# Altium PCB FLASHING_LED_23_9.PcbDoc
Units mm, origin at the board's own origin, x right, y up, seen from the top; angles counter-clockwise.
Board outline 43.05 x 19.56 mm, 2 copper layers (Top Layer, Bottom Layer); 9 components, 7 nets, 30 pads, 0 vias.
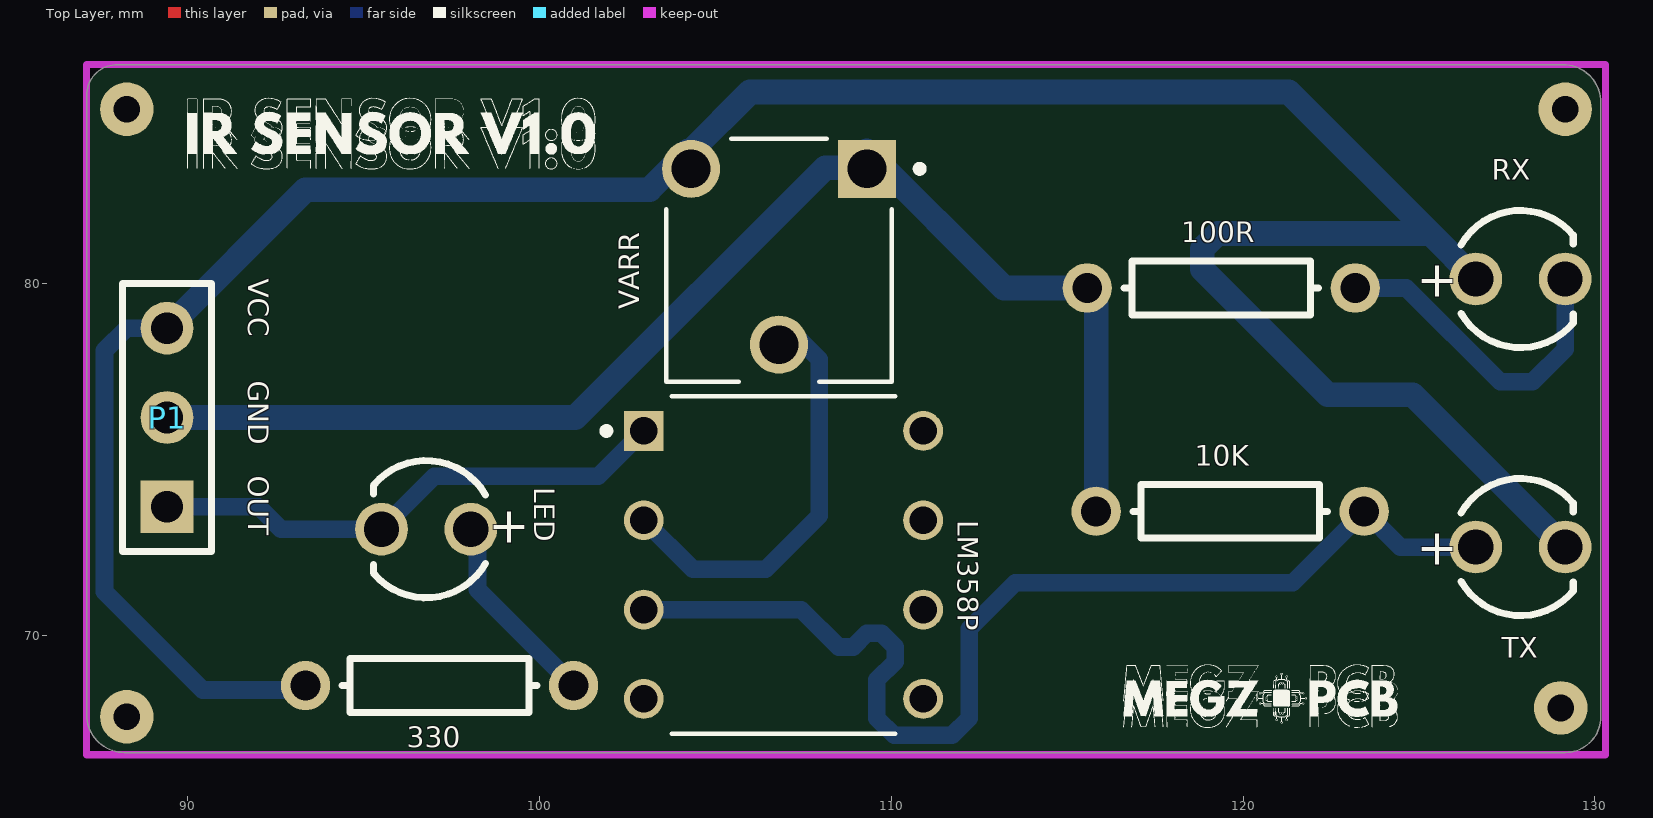
[diagram p0: Top Layer view]
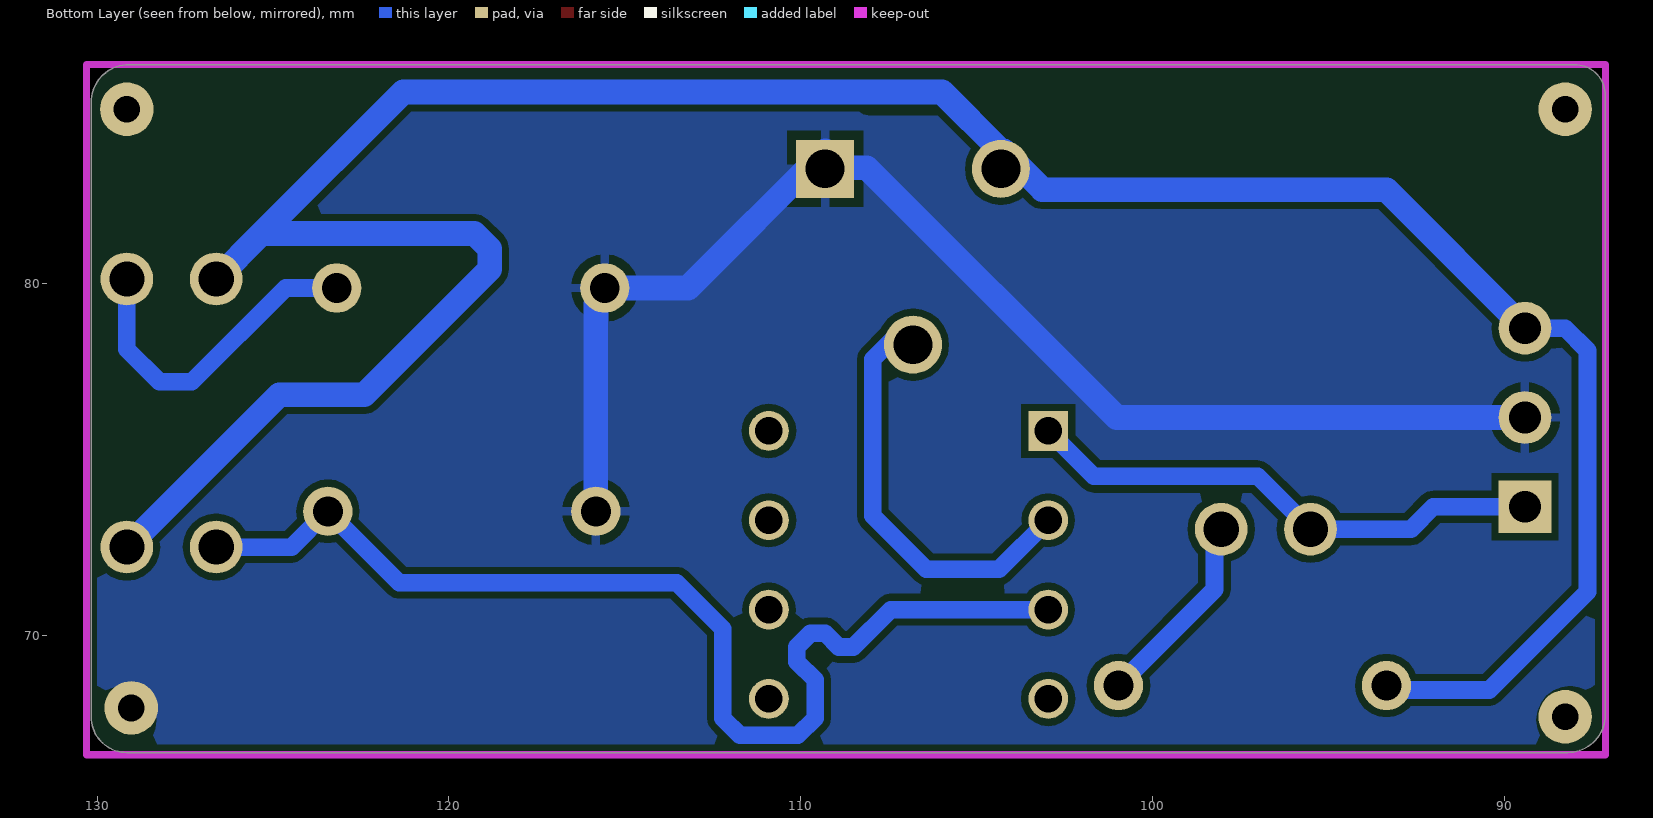
[diagram p1: Bottom Layer view, seen from below]
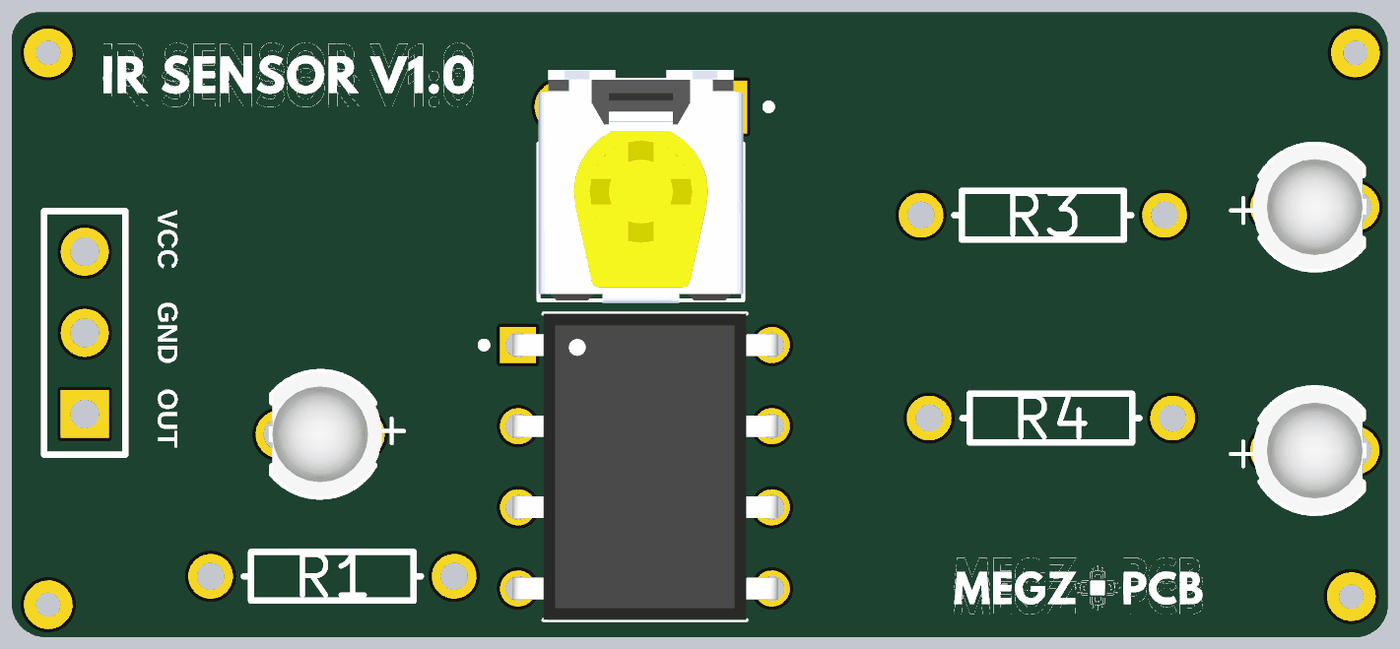
[diagram p2: 3D render of the assembled board from above, using the file's embedded part models]

## Layer stack, top to bottom
Top Solder: solder mask 0.0102, Solder Resist, Dk 3.5
Top Layer: signal copper 0.0356
Dielectric 1: dielectric 0.32, FR-4, Dk 4.8
Bottom Layer: signal copper 0.0356
Bottom Solder: solder mask 0.0102, Solder Resist, Dk 3.5

## Board outline
87.122,67.75 87.122,85.366 cw(c87.989,85.366) 87.989,86.233 129.1,86.233 cw(c129.1,85.158) 130.175,85.158 130.175,67.691 cw(c129.159,67.691) 129.159,66.675 88.197,66.675 cw(c88.197,67.75)

## Design rules (kind name [scope] priority, off if disabled: settings)
Clearance Clearance_2 [InNamedPolygon('GND')] p1: gap=0.2 ignorepadtopadclearanceinfootprint=FALSE
Clearance Clearance_1 [InNamedPolygon('GND')] p2: gap=0.2 ignorepadtopadclearanceinfootprint=FALSE
Clearance gndpoly [InNamedPolygon('GND')] p3: gap=0.2 ignorepadtopadclearanceinfootprint=FALSE
Clearance [All] p4: gap=0.2 ignorepadtopadclearanceinfootprint=FALSE
PolygonConnect [All] p1: connectstyle=Relief reliefconductorwidth=0.254 reliefentries=4 polygonreliefangle="90 Angle" airgapwidth=0.254
RoutingLayers [All] p1: top layer_v5=FALSE bottom layer_v5=TRUE
RoutingVias [All] p1: holewidth=0.711 width=1.27 viastyle="Through Hole" minholewidth=0.711 minwidth=1.27 maxholewidth=0.711 maxwidth=1.27
SolderMaskExpansion [All] p1: expansion=0.102 istentingtop=FALSE
SupplyNets "Schematic Supply Nets_1" [InNet('GND')] p1: voltage=0.000
SupplyNets "Schematic Supply Nets" [InNet('+5')] p2: voltage=0.000
UnRoutedNet [All] p1: checkbadconnections=TRUE
Width Width_3 [InNet('NetD3_1')] p1: maxlimit=1 minlimit=0.254 preferedwidth=0.5
Width Width_2 [InNet('NetR2_2')] p2: maxlimit=1 minlimit=0.254 preferedwidth=0.5
Width Width_1 [InNet('OUT')] p3: maxlimit=1 minlimit=0.254 preferedwidth=0.5
Width [InNet('NetD2_2')] p4: maxlimit=1 minlimit=0.254 preferedwidth=0.5
Width Width1 [InNet('NetD1_2')] p5: maxlimit=1 minlimit=0.254 preferedwidth=0.5
Width GND [InNet('GND')] p6: maxlimit=1 minlimit=0.254 preferedwidth=0.7
Width power [InNet('+5')] p7: maxlimit=1 minlimit=0.254 preferedwidth=0.7
28 further rules are at their usual default settings.

## Components (designator, comment, footprint, x,y, rotation, side; value= is the part's Value field where it differs from the comment)
10K "Res1" AXIAL-0.3 119.634,73.533 r0 top value=10k (schematic designator R4)
100R "Res1" AXIAL-0.3 119.38,79.883 r0 top value=100 (schematic designator R3)
330 "Res1" AXIAL-0.3 97.155,68.58 r180 top value=330R (schematic designator R1)
LED "Infrared, 1.5V, 35°" WL-TIRW_D3.9H5.3 96.774,73.025 r180 top (schematic designator D1)
LM358P "LM358P" DIP794W45P254L959H508Q8 106.934,72.009 r0 top (schematic designator U1)
P1 "Header 3" HDR1X3 89.408,73.66 r90 top
RX "Infrared, 1.5V, 35°" WL-TIRW_D3.9H5.3 127.889,80.137 r0 top (schematic designator D3)
TX "Infrared, 1.5V, 35°" WL-TIRW_D3.9H5.3 127.889,72.517 r0 top (schematic designator D2)
VARR "EVN-D8AA03B55" TRIM_EVN-D8AA03B55 106.807,80.772 r180 top (schematic designator R2)

## Footprints (in the part's own frame and the unit in brackets; to place one, negate y for a bottom-side part, rotate by r counter-clockwise, add the part's x,y. Pads: shape width x height; smd on the part's side, far side on the other; paste and mask are expansions set on the pad)
AXIAL-0.3 [mm] "Axial Device, Thru-Hole; 2 Leads; 0.3 in Pin Spacing"
  round 1.4 hole 0.85: 1(-3.81,0) 2(3.81,0)
  silkscreen extent -2.77,-0.76 2.77,0.76
DIP794W45P254L959H508Q8 [mm]
  rect 1.13x1.13 / inner round 1.13 / far side rect 1.13x1.13 hole 0.78: 1(-3.97,3.81)
  round 1.13 hole 0.78: 2(-3.97,1.27) 3(-3.97,-1.27) 4(-3.97,-3.81) 5(3.97,-3.81) 6(3.97,-1.27) 7(3.97,1.27) 8(3.97,3.81)
  silkscreen extent -5.13,-4.79 3.17,4.79, body extent -4.15,-4.79 4.15,4.79, height 5.08
HDR1X3 [mm] "Connector; Header; 3 Position"
  rect 1.5x1.5 hole 0.9: 1(0,0)
  round 1.5 hole 0.9: 2(2.54,0) 3(5.08,0)
  silkscreen extent -1.27,-1.27 6.35,1.27
TRIM_EVN-D8AA03B55 [mm]
  rect 1.65x1.65 / inner round 1.65 / far side rect 1.65x1.65 hole 1.1: 1(-2.5,-2.5)
  round 1.65 hole 1.1: 2(0,2.5) 3(2.5,-2.5)
  silkscreen extent -4.1,-3.35 3.2,3.55, body extent -3.2,-3.65 3.2,3.65, height 6.35
WL-TIRW_D3.9H5.3 [mm] "THT Infrared Round Waterclear, body diameter 3.9mm"
  round 1.5 hole 1: 1(1.27,0) 2(-1.27,0)
  silkscreen extent -1.69,-1.95 1.5,1.95, body extent -1.95,-1.95 1.62,1.95, height 5.33

## Part data
10K 100R 330: "Resistor", LatestRevisionDate=17-Jul-2002, LatestRevisionNote="Re-released for DXP Platform.", PackageDescription="Axial Device, Thru-Hole; 2 Leads; 0.3 in Pin Spacing", PackageReference=AXIAL-0.3, Published=8-Jun-2000, Publisher="Altium Limited"
LED RX TX: library part 15400385A3590, "WL-TIRW THT Infrared Round Waterclear, D3.9 x H5.3mm, 60mW/sr, Infrared, 1.5V, 35°", Emitting Color=Infrared, Forward Voltage=1.5V, Manufacturer="Wurth Elektronik", Operating Temperature Max=85°C, Operating Temperature Min=-40°C, Category="Infrared LEDs", Centroid Wavelength=845nm, Chip Technology=AlGaAs, ComponentLink1Description="Website Link", ComponentLink1URL=https://www.we-online.com/redexpert/article/15400385A3590?ad, ComponentLink2Description="Datasheet Link", ComponentLink2URL=https://www.we-online.com/redexpert/spec/15400385A3590?ad, Diameter=3.9mm, Height=5.3mm, Manufacturer Part Number=15400385A3590, Match Code=WL-TIRW, Mount="Through Hole", Packaging=Bulk, Peak Wavelength=850nm, Radiant Intensity=60mW/sr, Viewing Angle=35°
LM358P: "Dual, 30-V, 700-kHz operational amplifier", Package="PDIP-8 Texas", Check_prices=https://www.snapeda.com/parts/LM358P/Texas+Instruments/view-part/?ref=eda, MF="Texas Instruments", MP=LM358P, SnapEDA_Link=https://www.snapeda.com/parts/LM358P/Texas+Instruments/view-part/?ref=snap
P1: "Header, 3-Pin", LatestRevisionDate=17-Jul-2002, LatestRevisionNote="Re-released for DXP Platform.", Publisher="Altium Limited"
VARR: "500 kOhms 0.1W, 1/10W PC Pins Through Hole Trimmer Potentiometer Carbon 1.0 Turn Top Adjustment", Package="PQFP-44 Panasonic", Check_prices=https://www.snapeda.com/parts/EVN-D8AA03B55/Panasonic+Electronic+Components/view-part/?ref=eda, MF="Panasonic Electronic", MP=EVN-D8AA03B55, SnapEDA_Link=https://www.snapeda.com/parts/EVN-D8AA03B55/Panasonic+Electronic+Components/view-part/?ref=snap

## Free pads (board coordinates)
  round 1.524 hole 0.762: 1(88.265,84.963) 2(129.159,84.963) 3(129.032,67.945) 4(88.265,67.691)

## Nets (pads, with @x,y where several pads share a name; then routed paths per layer and width w, separated by ;. In a path a pad name is that pad's centre, name@x,y a point inside that pad or via, vN(x,y) a via of type N, cw(c..) or ccw(c..) an arc to the next point about the centre after c; other vN are vias at no path point)
+5: 330.2 P1.3 RX.2 TX.1 VARR.3 | length 79.2
  Bottom Layer w0.5: P1.3 88.265,78.74 87.63,78.105 87.63,71.247 90.424,68.453 330.2@93.717,68.453
  Bottom Layer w0.7: P1.3 93.345,82.677 103.124,82.677 104.227,83.78 104.307,83.78 105.982,85.455 121.301,85.455 125.323,81.433 ; RX.2 125.323,81.433 ; TX.1 124.828,76.848 122.415,76.848 118.846,80.417 118.846,80.997 119.282,81.433 125.323,81.433
GND: 10K.1 100R.1 P1.2 VARR.1 | length 37.4
  Bottom Layer w0.7: P1.2 101.013,76.2 108.118,83.305 108.832,83.305 109.307,83.78 113.204,79.883 100R.1 115.57,79.694 115.824,79.44 10K.1
NetD1_2: 330.1 LED.2 | length 5.7
  Bottom Layer w0.5: LED.2 98.235,72.834 98.235,71.31 330.1
NetD2_2: 10K.2 LM358P.3 TX.2 | length 31.9
  Bottom Layer w0.5: LM358P.3 107.442,70.739 108.505,69.676 108.919,69.676 109.306,70.063 109.72,70.063 110.107,69.676 110.107,69.262 109.589,68.744 109.589,67.654 110.082,67.161 111.726,67.161 112.219,67.654 112.219,70.194 113.526,71.501 121.412,71.501 10K.2 123.463,73.533 124.479,72.517 TX.2
NetD3_1: 100R.2 RX.1 | length 9.5
  Bottom Layer w0.5: 100R.2 124.645,79.883 127.312,77.216 128.231,77.216 129.159,78.144 RX.1
NetR2_2: LM358P.2 VARR.2 | length 12.2
  Bottom Layer w0.5: LM358P.2 104.361,71.882 106.426,71.882 107.95,73.406 107.95,77.851 107.021,78.78 VARR.2@106.807,78.78
OUT: LED.1 LM358P.1 P1.1 | length 15
  Bottom Layer w0.5: P1.1 92.013,73.66 92.648,73.025 LED.1 97.004,74.525 101.67,74.525 LM358P.1
pads on no net: LM358P.4 LM358P.5 LM358P.6 LM358P.7 LM358P.8

## Polygon pours and split planes (outlines as drawn)
GND on Bottom Layer "GND" (solid, remove dead copper, pour order 0): 87.122,66.611 130.302,66.611 130.302,85.788 87.122,85.788

## Keep-outs
Keep-Out Layer:
  lines w0.2: 87.122,66.611 87.122,86.233 130.302,86.233 130.302,66.611 87.122,66.611

## Silkscreen, mask and mechanical layers (free items; w line width, h text height)
Top Overlay:
  drawing of 166 lines, arcs and shapes, not listed
  text "VCC" at 91.517,80.141 h1 r270
  text "GND" at 91.516,77.25 h1 r270
  text "OUT" at 91.516,74.548 h1 r270
Mechanical 1:
  the board outline again, w0.254

## Text inside footprints (layer, text, board x,y; h text height)
LED: Top Overlay "+" at 99.724,73.525 h1.02 r180
RX: Top Overlay "+" at 124.939,79.637 h1.02
TX: Top Overlay "+" at 124.939,72.017 h1.02